# Altium PCB rtc.PcbDoc
Units mm, origin at the board's own origin, x right, y up, seen from the top; angles counter-clockwise.
Board outline 36.89 x 35.2 mm, 2 copper layers (Top Layer, Bottom Layer), stack 1.671 mm thick; 13 components, 11 nets, 59 pads, 4 vias.
Unrouted connection lines stored in the file: 9.
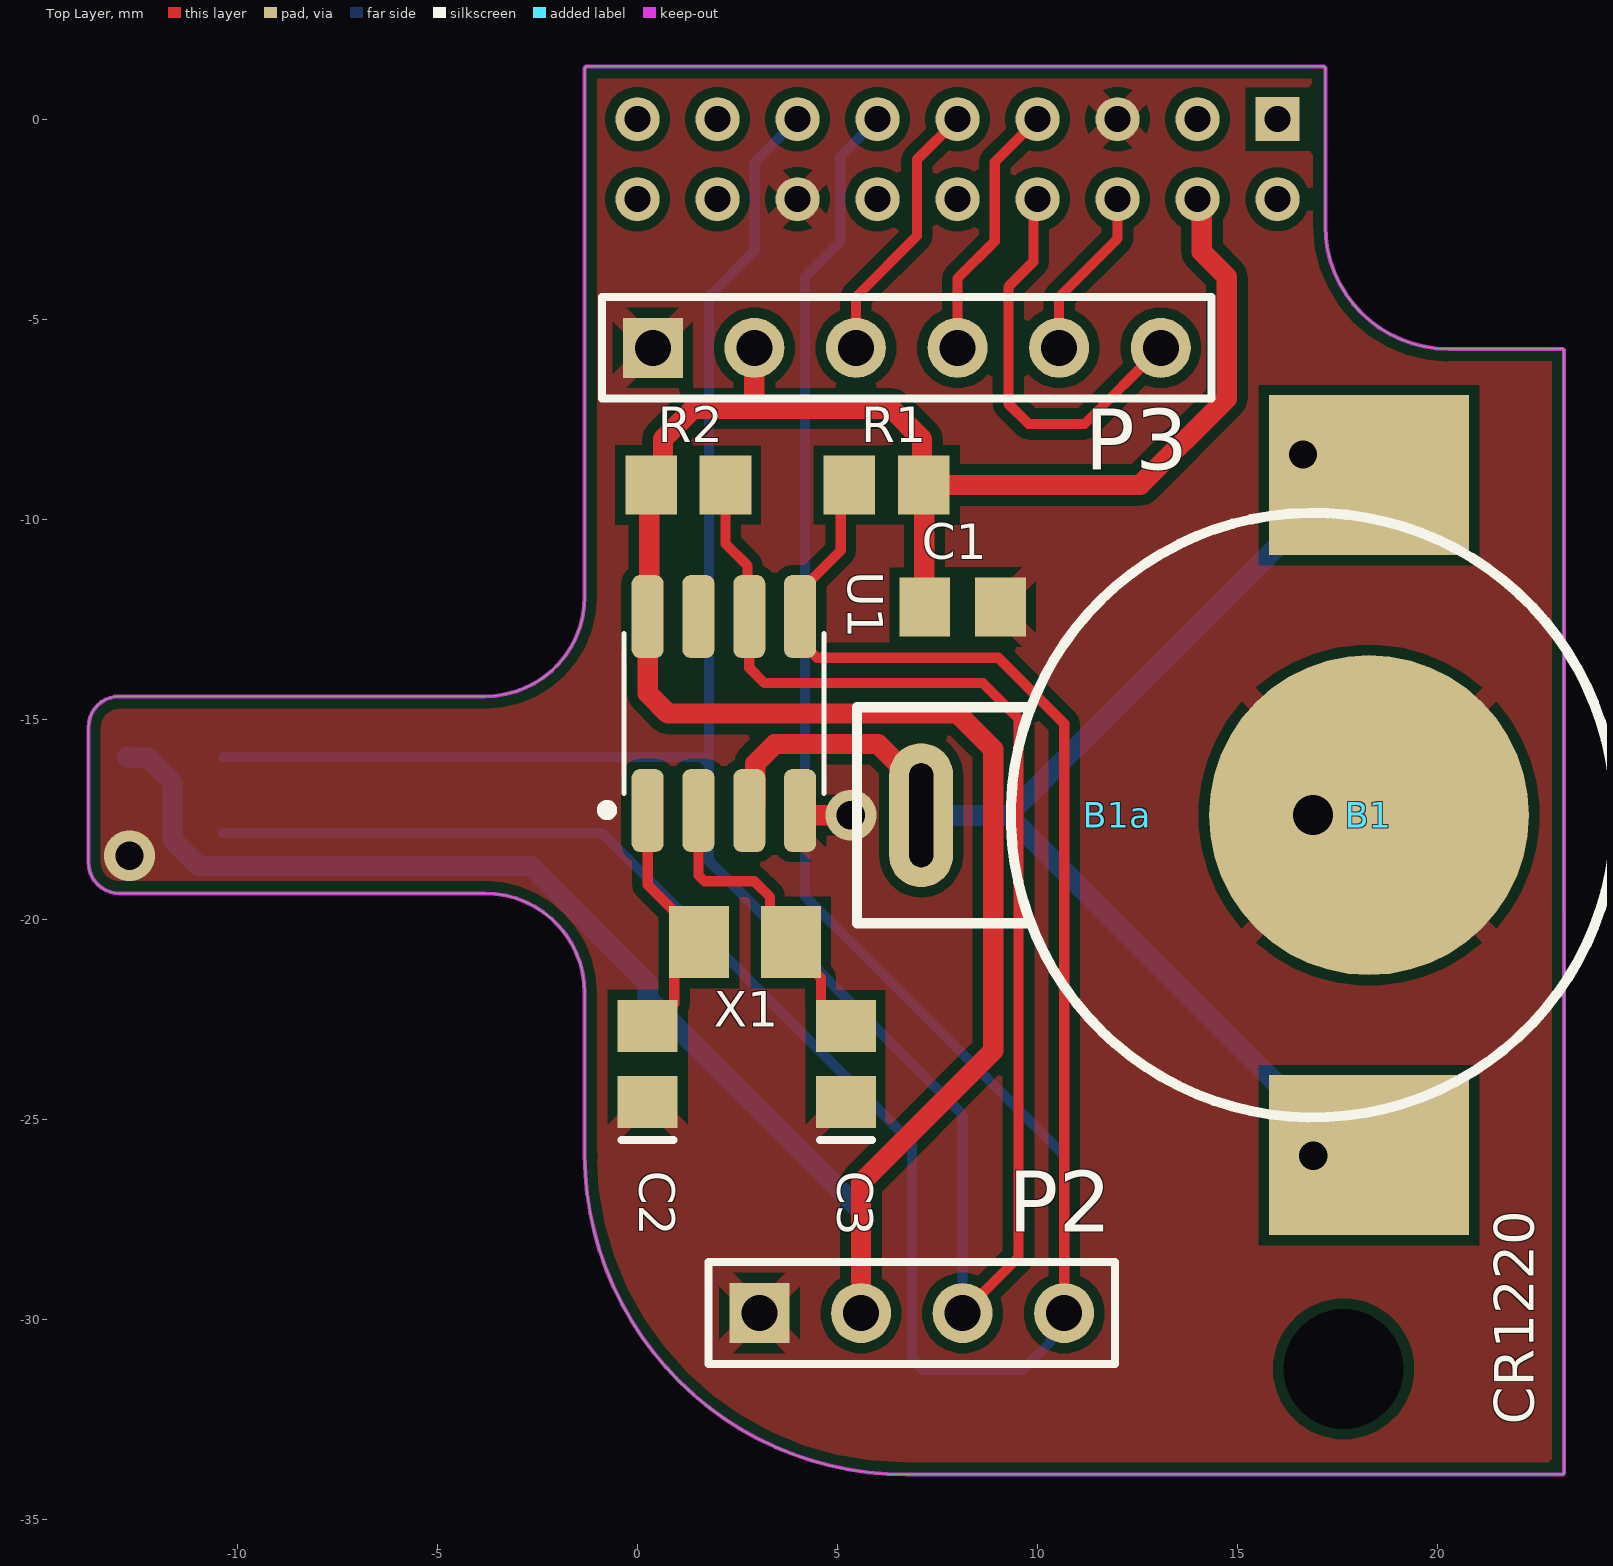
[diagram p0: Top Layer view]
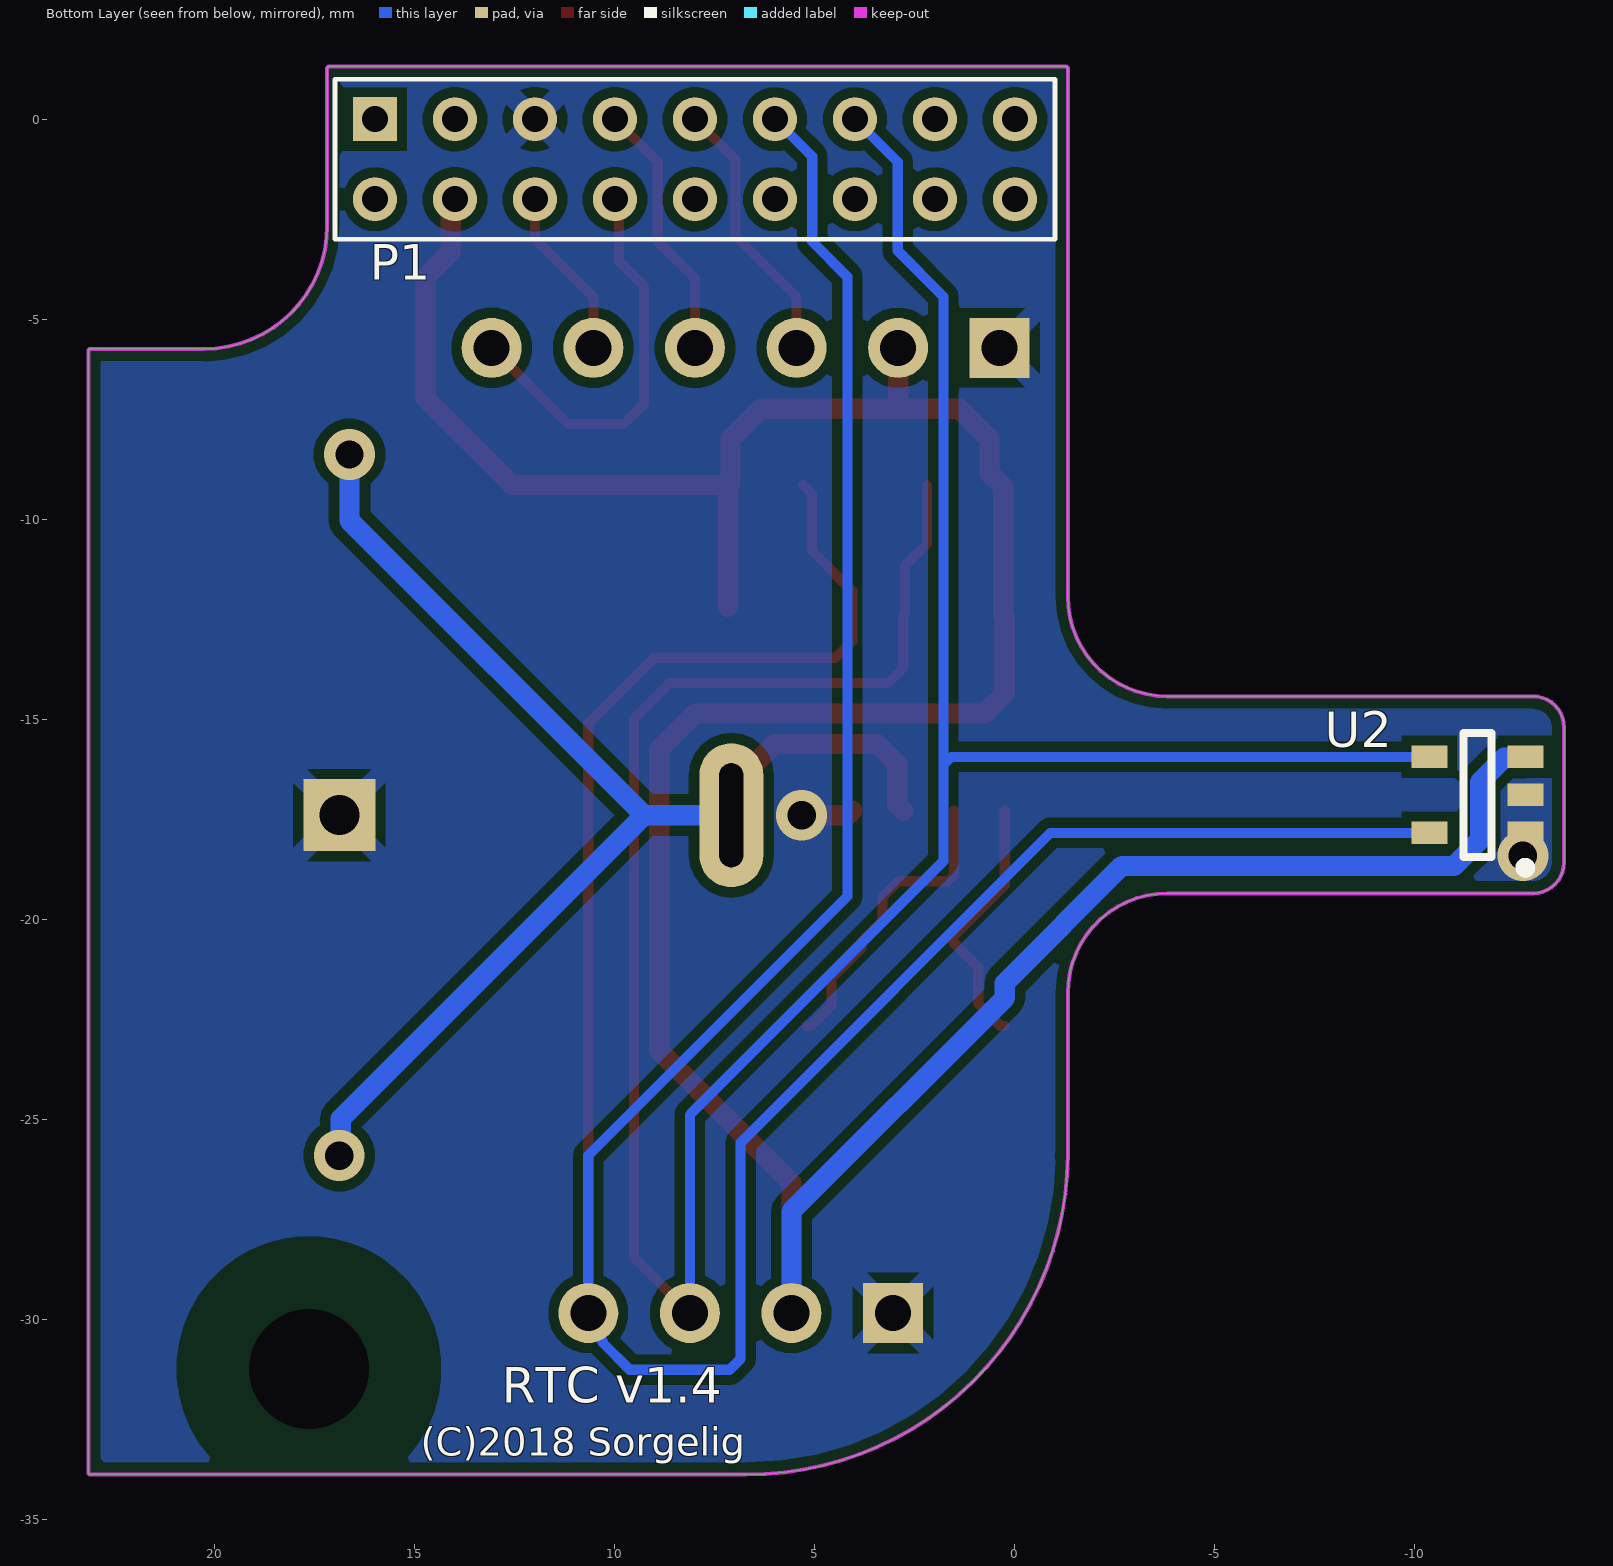
[diagram p1: Bottom Layer view, seen from below]
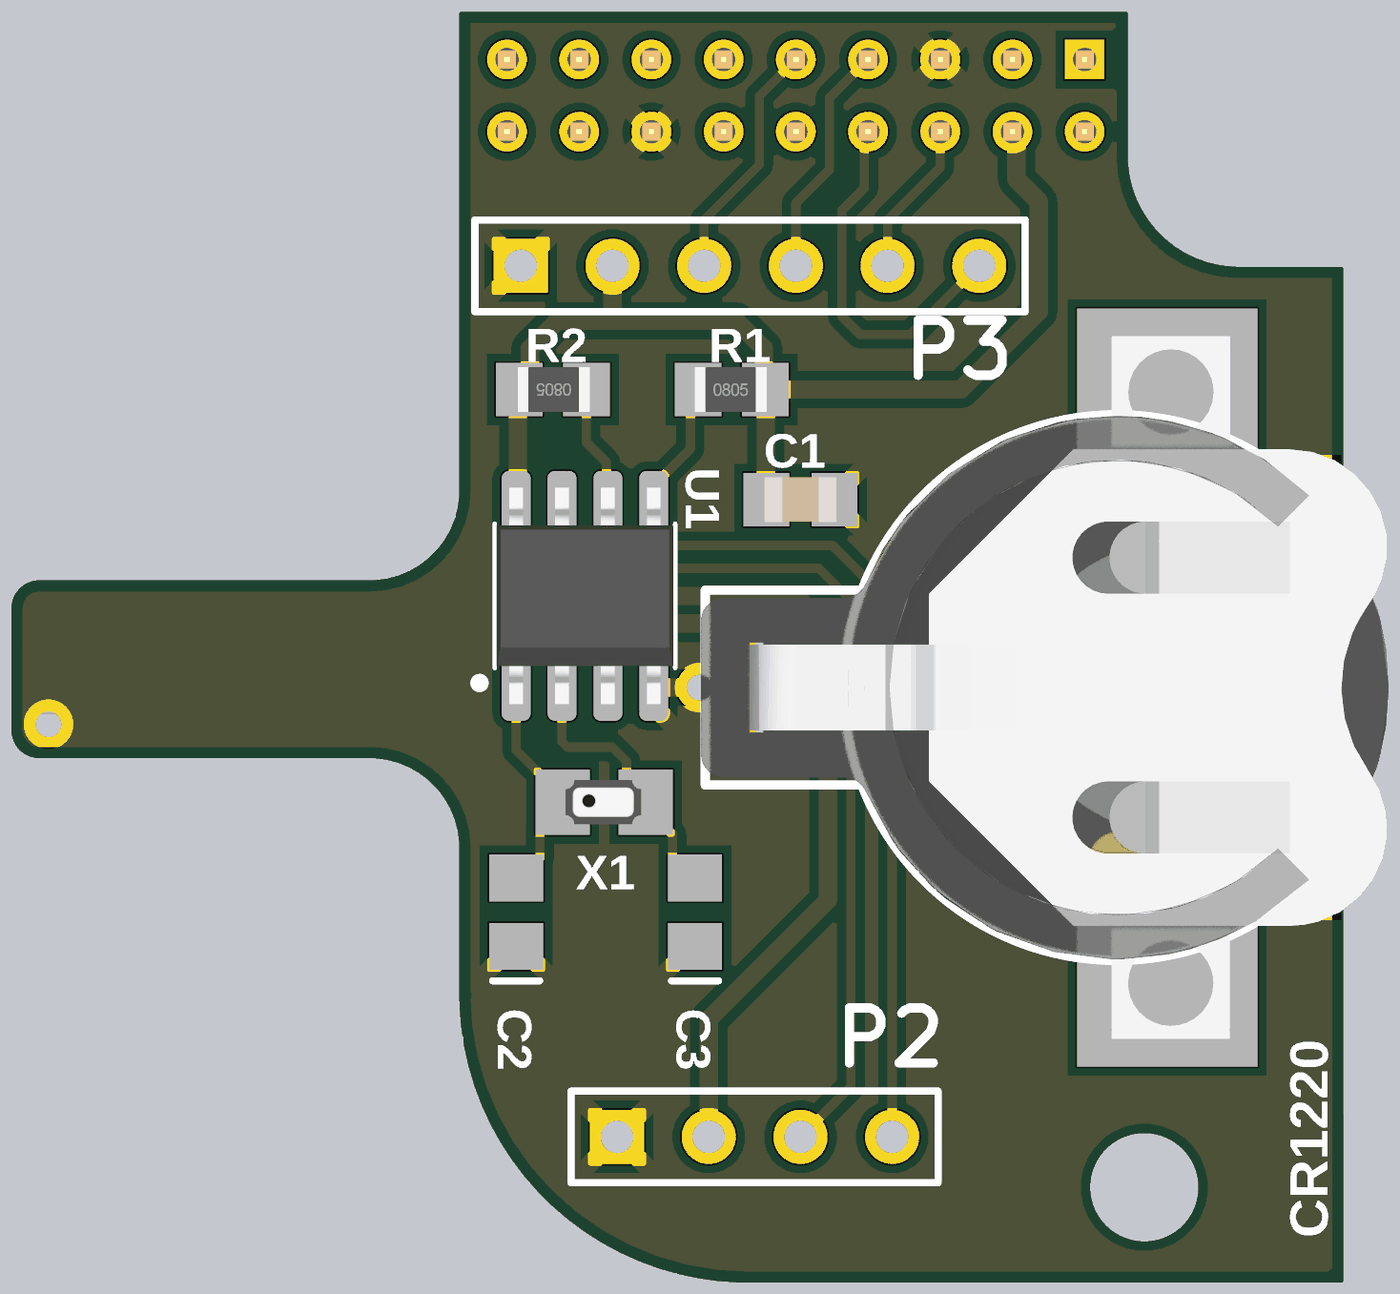
[diagram p2: 3D render of the assembled board from above, using the file's embedded part models]

## Layer stack, top to bottom
Top Solder: solder mask 0.0102, Solder Resist, Dk 3.5
Top Layer: signal copper 0.0356
Dielectric 1: dielectric 1.6, FR-4, Dk 4.8
Bottom Layer: signal copper 0.0356
Bottom Solder: solder mask 0.0102, Solder Resist, Dk 3.5

## Board outline
-12.954,-19.354 -3.81,-19.354 cw(c-3.81,-21.844) -1.32,-21.844 -1.32,-25.908 ccw(c6.692,-25.87) 6.73,-33.882 23.113,-33.882 ccw(c23.113,-33.832) 23.163,-33.832 23.162,-5.793 ccw(c23.112,-5.793) 23.112,-5.743 20.271,-5.743 cw(c20.271,-2.667) 17.195,-2.667 17.195,1.269 ccw(c17.145,1.269) 17.145,1.319 -1.27,1.319 ccw(c-1.27,1.269) -1.32,1.269 -1.32,-11.938 cw(c-3.81,-11.938) -3.81,-14.428 -12.954,-14.428 ccw(c-12.954,-15.2) -13.727,-15.2 -13.727,-18.582 ccw(c-12.954,-18.582)

## Design rules (kind name [scope] priority, off if disabled: settings)
BoardOutlineClearance [All] p1: gap=0 ignorepadtopadclearanceinfootprint=FALSE
Clearance keep-out_clearance [InNamedPolygon('ground') vs OnLayer('Keep-Out Layer')] p1: gap=0 ignorepadtopadclearanceinfootprint=FALSE
Clearance [All] p2: gap=0.254 ignorepadtopadclearanceinfootprint=TRUE except(0: Arc-Hole Track-Hole SMDPad-Hole THPad-Hole Via-Hole Fill-Hole Poly-Hole Region-Hole Text-Hole)
ComponentClearance [All] p1 off: gap=0.254 collisioncheckmode=3 verticalgap=0.254 showdistances=FALSE
DiffPairsRouting [All] p1: maxlimit=0.254 minlimit=0.254 mostfreqgap=0.254 substack1={5FC4F890-FC4C-4B15-9ADF-B3BB21DC8AD9} toplayer_{5fc4f890-fc4c-4b15-9adf-b3bb21dc8ad9}_minwidth=0.381 toplayer_{5fc4f890-fc4c-4b15-9adf-b3bb21dc8ad9}_maxwidth=0.381 toplayer_{5fc4f890-fc4c-4b15-9adf-b3bb21dc8ad9}_prefwidth=0.381 bottomlayer_{5fc4f890-fc4c-4b15-9adf-b3bb21dc8ad9}_minwidth=0.381 bottomlayer_{5fc4f890-fc4c-4b15-9adf-b3bb21dc8ad9}_maxwidth=0.381 bottomlayer_{5fc4f890-fc4c-4b15-9adf-b3bb21dc8ad9}_prefwidth=0.381 toplayer_minwidth=0.381 toplayer_maxwidth=0.381 toplayer_prefwidth=0.381 bottomlayer_minwidth=0.381 bottomlayer_maxwidth=0.381 bottomlayer_prefwidth=0.381 substack2={1C550BE1-56C3-4E1D-A89B-8C6B867F7131} toplayer_{1c550be1-56c3-4e1d-a89b-8c6b867f7131}_minwidth=0.381 toplayer_{1c550be1-56c3-4e1d-a89b-8c6b867f7131}_maxwidth=0.381 toplayer_{1c550be1-56c3-4e1d-a89b-8c6b867f7131}_prefwidth=0.381 bottomlayer_{1c550be1-56c3-4e1d-a89b-8c6b867f7131}_minwidth=0.381 bottomlayer_{1c550be1-56c3-4e1d-a89b-8c6b867f7131}_maxwidth=0.381 bottomlayer_{1c550be1-56c3-4e1d-a89b-8c6b867f7131}_prefwidth=0.381 maxuncoupledlength=12.7
Height [All] p1 off: minheight=0 maxheight=25.4 prefheight=12.7
HoleSize [All] p1: absolutevalues=TRUE maxlimit=6 minlimit=0.025 maxpercent=80.000 minpercent=20.000
MinimumSolderMaskSliver [All] p1: minsoldermaskwidth=0.25
PolygonConnect PolygonConnect_1 [HasFootprint('SOT23-5') or IsVia] p1: connectstyle=Direct reliefconductorwidth=0.762 reliefentries=4 polygonreliefangle="90 Angle" airgapwidth=0.254
PolygonConnect [not IsVia] p2: connectstyle=Relief reliefconductorwidth=0.5 reliefentries=4 polygonreliefangle="45 Angle" airgapwidth=0.254
RoutingVias [All] p1: holewidth=0.4 width=1 viastyle="Through Hole" minholewidth=0.4 minwidth=1 maxholewidth=0.4 maxwidth=1
SilkToSolderMaskClearance [IsPad] p1 off: minsilkscreentomaskgap=0.127 clearancetoexposedcopper=TRUE
SolderMaskExpansion SolderMaskExpansion_U1 [InComponent('U1')] p1: expansion=0 istentingtop=FALSE
SolderMaskExpansion [All] p2: expansion=0.051 istentingtop=FALSE
Width Width_power [InNetClass('power')] p1: maxlimit=2 minlimit=0.254 preferedwidth=0.508 substack1={5FC4F890-FC4C-4B15-9ADF-B3BB21DC8AD9} substack2={1C550BE1-56C3-4E1D-A89B-8C6B867F7131} minimp=50.000000 maximp=50.000000 favimp=50.000000
Width Width_signal [All] p2: maxlimit=0.254 minlimit=0.254 preferedwidth=0.254 substack1={5FC4F890-FC4C-4B15-9ADF-B3BB21DC8AD9} substack2={1C550BE1-56C3-4E1D-A89B-8C6B867F7131}
24 further rules are at their usual default settings.

## Classes and differential pairs
net class power: 3v3 BAT GND

## Components (designator, comment, footprint, x,y, rotation, side; value= is the part's Value field where it differs from the comment)
B1 "*" KS3000 18.287,-17.399 r270 top locked
B1a "BAT" BAT 16.891,-17.399 r90 top locked
C1 "C0805" C0805 8.128,-12.192 r180 top value=10uF
C2 "C0805" 0805 0.254,-23.622 r90 top value=9pF
C3 "C0805" 0805 5.207,-23.622 r90 top value=9pF
P1 "LTC" hdr9x2 16,0 r180 bottom locked
P2 "I2C" HDR1X4 3.048,-29.845 r0 top
P3 "SPI" HDR1X6 0.381,-5.715 r0 top
R1 "4.7K" R0805 6.223,-9.144 r0 top
R2 "4.7K" R0805 1.27,-9.144 r180 top
U1 "M41T81/MCP79400" SOIC8P 2.159,-14.859 r0 top
U2 "AD7415-0/AD7414-0/TC74A1-3.3V" SOT23-5 -11.557,-16.891 r0 bottom
X1 "FC-12M/FC-135R (32768 Hz)" OSC 2.667,-20.574 r0 top

## Footprints (in the part's own frame and the unit in brackets; to place one, negate y for a bottom-side part, rotate by r counter-clockwise, add the part's x,y. Pads: shape width x height; smd on the part's side, far side on the other; paste and mask are expansions set on the pad)
0805 [mm] "Chip Capacitor; Body 2.0 x 1.2 mm (LxW typ)"
  rect 1.3x1.5 smd: 1(-0.95,0) 2(0.95,0)
  silkscreen extent -1.9,-0.65 -1.9,0.65
BAT [mm] "DIPS, 9.80 mm lead span, 0.00 mm pitch; 2 pin, 15.10 mm L X 14.00 mm W X 7.90 mm H body"
  rect 1.8x1.8 hole 1: 1(0,0)
  oval 3.6x1.6 hole 0.6 slot 2.6 at 0 deg: 2(0,9.8)
  silkscreen extent -7.56,-7.56 7.56,11.4, body extent -7.53,-7.53 7.53,11.52, height 4.57
C0805 [mm] "Capacitor, Chip; 2.35 mm L X 1.35 mm W X 1.00 mm H body"
  rect 1.27x1.48 smd: 1(-0.945,0) 2(0.945,0)
  body extent -1,-0.62 1,0.63, height 0.58
HDR1X4 [mm] "Connector; Header; 4 Position"
  rect 1.5x1.5 hole 0.9: 1(0,0)
  round 1.5 hole 0.9: 2(2.54,0) 3(5.08,0) 4(7.62,0)
  silkscreen extent -1.27,-1.27 8.89,1.27
HDR1X6 [mm] "Connector; Header; 6 Position"
  rect 1.5x1.5 hole 0.9: 1(0,0)
  round 1.5 hole 0.9: 2(2.54,0) 3(5.08,0) 4(7.62,0) 5(10.16,0) 6(12.7,0)
  silkscreen extent -1.27,-1.27 13.97,1.27
hdr9x2 [mm] "Header, Vertical Receptacle, 2.00 mm pitch; 0.50 mm lead width, 18 pins, 2 rows, 9 pins per row, 18.00 mm L X 4.00 mm W X 4.35 mm H body"
  rect 1.1x1.1 hole 0.65 paste-1.1: 1(0,0)
  round 1.1 hole 0.65 paste-1.1: 2(0,-2) 3(2,0) 4(2,-2) 5(4,0) 6(4,-2) 7(6,0) 8(6,-2) 9(8,0) 10(8,-2) 11(10,0) 12(10,-2) 13(12,0) 14(12,-2) 15(14,0) 16(14,-2) 17(16,0) 18(16,-2)
  silkscreen extent -1,-3 17,1, body extent -1,-3 17,1, height 4.35
KS3000 [mm]
  round 8 smd: 1(0,0)
  rect 4x5 smd: 2(-8.5,0) 2(8.5,0)
  body extent -9.73,-6.6 9.73,6.1, height 3.21
OSC [mm] "Oscillator, Corner Concave; 2.10 mm L X 1.225 mm W X 0.60 mm H body"
  rect 1.5x1.8 smd: 1(-1.126,0) 2(1.174,0)
  body extent -1.05,-0.61 1.05,0.61, height 0.6
R0805 [mm] "Resistor, Chip; 2.32 mm L X 1.25 mm W X 1.00 mm H body"
  rect 1.29x1.47 smd: 1(-0.93,0) 2(0.93,0)
  body extent -1.03,-0.62 0.97,0.63, height 0.42
SOIC8P [mm] "Small Outline IC (SOIC), 1.27 mm pitch; 8 pin, 4.90 mm L X 3.90 mm W X 1.75 mm H body"
  rrect51% 0.8x2.07 smd: 1(-1.905,-2.425) 2(-0.635,-2.425) 3(0.635,-2.425) 4(1.905,-2.425) 5(1.905,2.425) 6(0.635,2.425) 7(-0.635,2.425) 8(-1.905,2.425)
  silkscreen extent -3.05,-2.54 2.5,2, body extent -2.45,-3 2.45,3, height 1.75
SOT23-5 [mm] "SOT23, 5-Leads, Body 2.9x1.6mm, Pitch 0.95mm, Lead Span 2.7mm, IPC High Density"
  rect 0.9x0.56 smd mask+0.051: 1(-1.2,0.95) 2(-1.2,0) 3(-1.2,-0.95) 4(1.2,-0.95) 5(1.2,0.95)
  silkscreen extent -1.32,-1.55 0.35,1.95, body extent -1.41,-1.45 1.41,1.45, height 1.4

## Part data
B1: library part BAT_KS3000
C1 C2 C3: "Ceramic Chip Capacitor - Standard", PackageDocument=Mar-2001, Code_IPC=2012[0805], Code_JEITA=0805, ComponentLink1Description="Manufacturer Link", ComponentLink1URL=http://www.kemet.com/, ComponentLink2Description=Datasheet, ComponentLink2URL=http://www.kemet.com/kemet/web/homepage/kechome.nsf/vapubfilesname/F3102TA.pdf/$file/F3102TA.pdf, DatasheetDocument=Mar-2001, LatestRevisionDate=19-Mar-2004, LatestRevisionNote="Silkscreen size reduced.", Note="Footprint corresponds to dimensions for bulk cassette packaging. This case size has tightened tolerances.", PackageReference=0805, Published=17-Jul-2002, Publisher="Altium Limited"
P1: library part HDR9x2
P2: library part "Header 4", "Header, 4-Pin", LatestRevisionDate=17-Jul-2002, LatestRevisionNote="Re-released for DXP Platform.", Publisher="Altium Limited"
P3: library part "Header 6", "Header, 6-Pin", LatestRevisionDate=17-Jul-2002, LatestRevisionNote="Re-released for DXP Platform.", Publisher="Altium Limited"
R1 R2: library part ERJ6RS, "Low Ohmic Value Thick Film Chip Resistor, 0.1 Ohm to 0.2 Ohm Range, 1%, 2% and 5% Tolerance, 0805 Size, 0.125 W", PackageDocument=Mar-2003, Code_IPC="2012 [0805]", ComponentLink1Description="Manufacturer Link", ComponentLink1URL=http://www.panasonic.com/industrial/components/resistive_products.htm, ComponentLink2Description=Datasheet, ComponentLink2URL=http://www.panasonic.com/industrial/components/pdf/AOA0000CE3.pdf, LatestRevisionDate=19-Mar-2004, LatestRevisionNote="Silkscreen size reduced.", PackageReference=6-0805, Published=17-Dec-2003, Publisher="Altium Limited"
U1: library part M41T
U2: library part AD7415
X1: library part OSC

## Free pads (board coordinates)
  round 0 hole 3 unplated mask-3: ""(17.652,-31.242)

## Via types
v1: diameter 1.27, hole 0.711, Top Layer to Bottom Layer, 4 vias

## Nets (pads, with @x,y where several pads share a name; then routed paths per layer and width w, separated by ;. In a path a pad name is that pad's centre, name@x,y a point inside that pad or via, vN(x,y) a via of type N, cw(c..) or ccw(c..) an arc to the next point about the centre after c; other vN are vias at no path point)
3v3: C1.2 P1.4 P2.2 P3.2 R1.2 R2.2 U1.8 U2.3 | length 84.4
  Top Layer w0.508: U1.8 0.254,-14.351 0.762,-14.859 8.001,-14.859 8.89,-15.748 8.89,-23.291 5.588,-26.593 P2.2 ; U1.8@0.297,-12.434 0.297,-9.187 R2.2 0.637,-8.847 0.637,-7.999 1.397,-7.239 2.921,-7.239 ; P3.2 2.921,-7.239 ; C1.2 7.168,-12.177 7.168,-9.159 R1.2 ; P1.4 14.107,-2.107 14.107,-3.312 14.732,-3.937 14.732,-6.985 12.573,-9.144 R1.2 ; 2.921,-7.239 6.35,-7.239 7.112,-8.001 7.112,-9.103 R1.2
  Bottom Layer w0.508: U2.3 -12.731,-15.967 -12.233,-15.967 -11.625,-16.575 -11.625,-18.021 -10.977,-18.669 -2.675,-18.669 0.254,-21.598 0.254,-21.971 5.588,-27.305 P2.2
BAT: B1.2 B1a.2 U1.3 | length 32.7
  Top Layer w0.508: U1.3 2.94,-17.138 2.94,-16.11 3.429,-15.621 6.018,-15.621 7.091,-16.694 B1a.2
  Bottom Layer w0.508: B1a.2 9.271,-17.399 ; v1(16.637,-8.382) 16.637,-10.033 9.271,-17.399 ; v1(16.891,-25.908) 16.856,-25.873 16.856,-24.984 9.271,-17.399
GND: B1.1 B1a.1 C1.1 C2.1 C3.1 P1.5 P1.14 P2.1 P3.1 U1.4 U2.1 U2.2 | length 1.3
  Top Layer w0.508: U1.4 4.179,-17.399 v1(5.334,-17.399)
  other v1: -12.7,-18.415
MISO: P1.7 P3.4 | length 6.5
  Top Layer w0.254: P3.4 8.001,-3.979 8.931,-3.049 8.931,-1.069 P1.7
MOSI: P1.9 P3.3 | length 6.8
  Top Layer w0.254: P3.3 5.461,-4.445 6.985,-2.921 6.985,-1.015 P1.9
NetC2_2: C2.2 U1.1 X1.1 | length 6.5
  Top Layer w0.254: C2.2 0.354,-22.672 0.918,-22.108 0.918,-21.197 X1.1 1.541,-20.424 0.254,-19.137 U1.1
NetC3_2: C3.2 U1.2 X1.2 | length 7.7
  Top Layer w0.254: U1.2 1.524,-18.901 1.673,-19.05 2.921,-19.05 3.313,-19.442 3.313,-20.046 X1.2 3.841,-20.724 4.584,-21.467 4.584,-22.149 5.107,-22.672 C3.2
SCK: P1.6 P3.5 | length 4.3
  Top Layer w0.254: P3.5 10.541,-4.445 12,-2.986 P1.6
SCL: P1.13 P2.3 R2.1 U1.6 U2.4 | length 73.1
  Top Layer w0.254: R2.1 2.2,-10.614 2.753,-11.167 2.753,-12.393 U1.6 2.794,-13.716 3.175,-14.097 8.636,-14.097 9.525,-14.986 9.525,-28.448 P2.3
  Bottom Layer w0.254: U2.4 1.59,-15.941 1.79,-16.141 ; P1.13 2.931,-1.069 2.931,-3.292 1.79,-4.433 1.79,-16.141 ; P2.3 8.128,-24.892 1.79,-18.554 1.79,-16.141
SDA: P1.11 P2.4 R1.1 U1.5 U2.5 | length 90.4
  Top Layer w0.254: R1.1 5.08,-9.357 5.08,-10.783 4.064,-11.799 U1.5 4.064,-13.04 4.486,-13.462 9.017,-13.462 10.668,-15.113 P2.4
  Bottom Layer w0.254: U2.5 -0.889,-17.841 6.858,-25.588 6.858,-30.988 7.134,-31.264 9.63,-31.264 10.313,-30.581 10.313,-30.537 10.668,-30.182 10.668,-25.908 4.191,-19.431 4.191,-3.937 5.069,-3.059 5.069,-0.931 P1.11
SS: P1.8 P3.6 | length 10.2
  Top Layer w0.254: P1.8 9.896,-2.104 9.896,-3.566 9.271,-4.191 9.271,-7.112 9.779,-7.62 11.176,-7.62 P3.6
pads on no net: P1.1 P1.2 P1.3 P1.10 P1.12 P1.15 P1.16 P1.17 P1.18 U1.7

## Polygon pours and split planes (outlines as drawn)
GND on Bottom Layer "GND_L02_P032" (solid, pour order 32): 23.114,-5.715 23.114,-33.909 4.953,-33.909 4.699,-33.655 4.318,-33.655 4.064,-33.401 3.302,-33.401 2.794,-32.893 2.54,-32.893 1.778,-32.131 1.27,-32.131 1.27,-31.877 0.381,-30.988 0.381,-30.861 -0.381,-30.099 -0.381,-29.464 -1.016,-28.829 -1.016,-27.94 -1.27,-27.686 -1.27,-26.289 -1.397,-26.162 -1.397,-20.828 -2.54,-19.685 -3.429,-19.685 -3.937,-19.177 -5.207,-19.177 -5.08,-19.304 -13.335,-19.304 -13.716,-18.923 -13.716,-15.113 -13.589,-14.986 -13.589,-14.732 -13.462,-14.732 -13.208,-14.478 -3.175,-14.478 -2.667,-13.97 -2.413,-13.97 -2.413,-13.843 -1.524,-12.954 -1.524,-11.43 -1.397,-11.303 -1.397,1.397 -1.27,1.27 17.145,1.27 17.145,-3.302 17.399,-3.556 17.399,-3.937 17.907,-4.445 17.907,-4.572 18.415,-5.08 18.415,-5.207 18.542,-5.334 18.923,-5.334 19.304,-5.715 19.812,-5.715
GND on Top Layer "GND_L01_P031" (solid, pour order 31): 23.159,-5.59 23.159,-33.784 4.998,-33.784 4.744,-33.53 4.363,-33.53 4.109,-33.276 3.347,-33.276 2.839,-32.768 2.585,-32.768 1.823,-32.006 1.315,-32.006 1.315,-31.752 0.426,-30.863 0.426,-30.736 -0.336,-29.974 -0.336,-29.339 -0.971,-28.704 -0.971,-27.815 -1.225,-27.561 -1.225,-26.164 -1.352,-26.037 -1.352,-20.703 -2.495,-19.56 -3.384,-19.56 -3.892,-19.052 -5.162,-19.052 -5.035,-19.179 -13.29,-19.179 -13.671,-18.798 -13.671,-14.988 -13.544,-14.861 -13.544,-14.607 -13.417,-14.607 -13.163,-14.353 -3.13,-14.353 -2.622,-13.845 -2.368,-13.845 -2.368,-13.718 -1.479,-12.829 -1.479,-11.305 -1.352,-11.178 -1.352,1.522 -1.225,1.395 17.19,1.395 17.19,-3.177 17.444,-3.431 17.444,-3.812 17.952,-4.32 17.952,-4.447 18.46,-4.955 18.46,-5.082 18.587,-5.209 18.968,-5.209 19.349,-5.59 19.857,-5.59

## Keep-outs
Keep-Out Layer:
  lines w0.1: -12.954,-14.428 ccw(c-12.954,-15.2) -13.727,-15.2 -13.727,-18.582 ccw(c-12.954,-18.582) -12.954,-19.354 -3.81,-19.354 cw(c-3.81,-21.844) -1.32,-21.844 -1.32,-25.908 ; -12.939,-14.428 -3.81,-14.428 ccw(c-3.81,-11.938) -1.32,-11.938 -1.32,1.269 ; -1.32,-25.908 ccw(c6.692,-25.87) 6.73,-33.882 ; -1.32,-25.908 ccw(c-1.27,-25.908) -1.32,-25.908 ; -1.32,-25.908 ccw(c-1.27,-25.908) -1.32,-25.908 ; -1.32,1.269 cw(c-1.27,1.269) -1.27,1.319 ; -1.32,1.269 cw(c-1.27,1.269) -1.27,1.319 ; -1.27,1.319 17.145,1.319 ; 6.73,-33.882 6.73,-33.882 ; 6.73,-33.882 23.113,-33.882 ; 17.145,1.319 cw(c17.145,1.269) 17.195,1.269 ; 17.145,1.319 cw(c17.145,1.269) 17.195,1.269 ; 17.195,-2.667 ccw(c17.145,-2.667) 17.195,-2.667 ; 17.195,-2.667 ccw(c20.271,-2.667) 20.271,-5.743 ; 17.195,-2.667 17.195,-2.667 ; 17.195,-2.667 17.195,-2.667 ; 17.195,-2.667 17.195,1.269 ; 20.271,-5.743 ccw(c20.271,-5.793) 20.271,-5.743 ; 20.271,-5.743 20.271,-5.743 ; 20.271,-5.743 20.271,-5.743 ; 20.271,-5.743 23.112,-5.743 ; 23.112,-5.743 cw(c23.112,-5.793) 23.162,-5.793 ; 23.112,-5.743 cw(c23.112,-5.793) 23.162,-5.793 ; 23.113,-33.882 ccw(c23.113,-33.832) 23.163,-33.832 ; 23.113,-33.882 ccw(c23.113,-33.832) 23.163,-33.832 ; 23.163,-33.832 ccw(c23.113,-33.832) 23.163,-33.832 ; 23.163,-33.832 ccw(c23.113,-33.832) 23.163,-33.832 ; 23.163,-33.832 23.162,-5.793 ; 23.162,-5.793 ccw(c23.112,-5.793) 23.162,-5.793

## Other copper
Bottom Layer:
  pour cut-out: 17.652,-34.555 cw(c17.652,-31.242) 14.339,-31.242 cw(c17.652,-31.242) 17.652,-27.929 cw(c17.652,-31.242) 20.965,-31.242 cw(c17.652,-31.242)

## Silkscreen, mask and mechanical layers (free items; w line width, h text height)
Top Overlay:
  text "CR1220" at 22.732,-32.639 h1.7 r90
Bottom Overlay:
  text "RTC v1.4" at 12.827,-32.385 h1.52
  text "(C)2018 Sorgelig" at 14.859,-33.655 h1.2